# Altium PCB Capacitor1.0PCB.pcbdoc
Units mil, origin at the board's own origin, x right, y up, seen from the top; angles counter-clockwise.
Board outline 3165.09 x 2926.12 mil, 2 copper layers (Top Layer, Bottom Layer); 95 components, 60 nets, 238 pads, 394 vias.
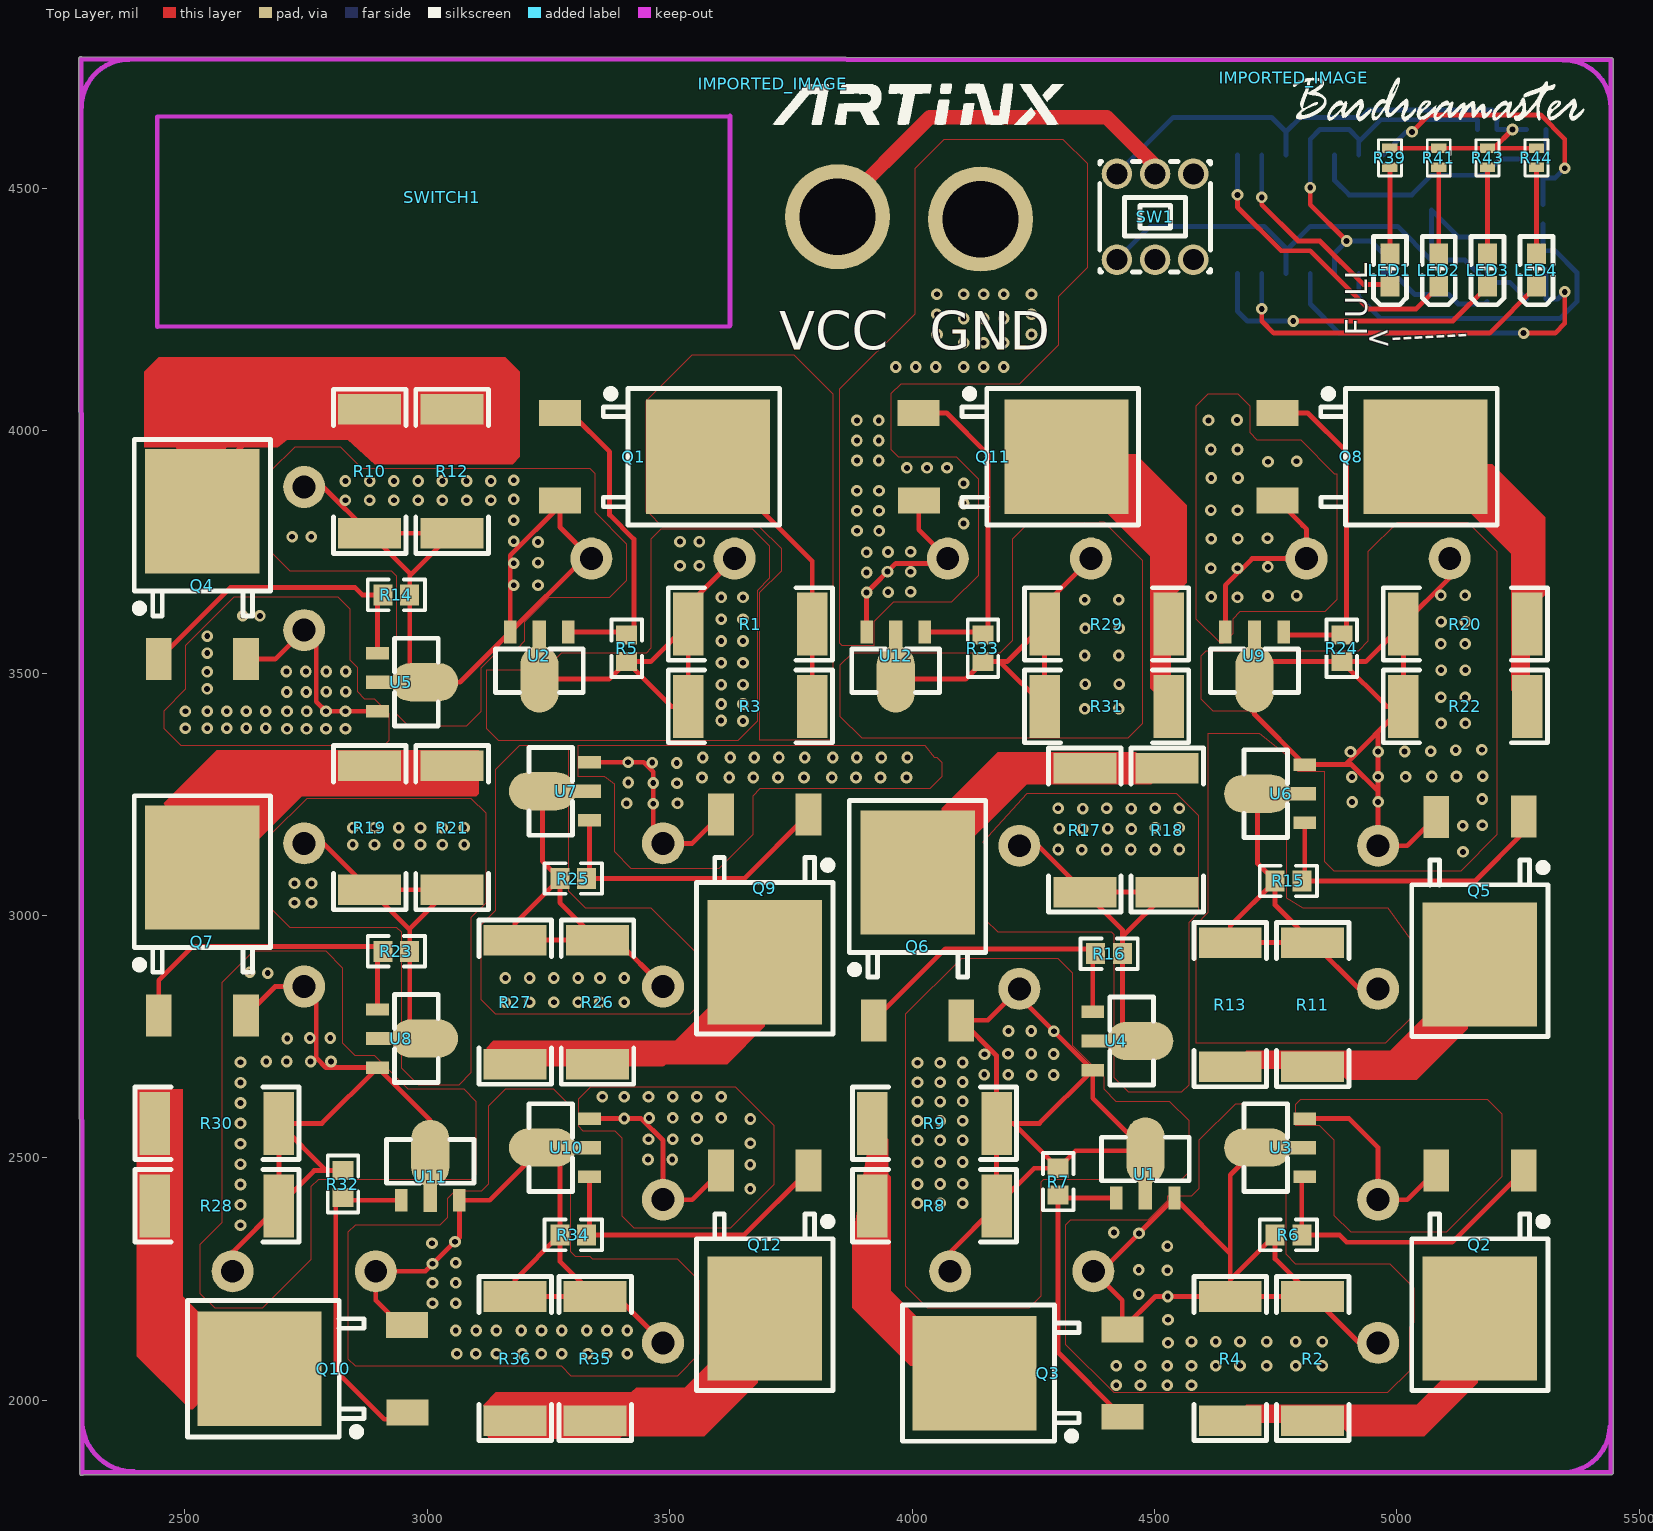
[diagram p0: Top Layer view]
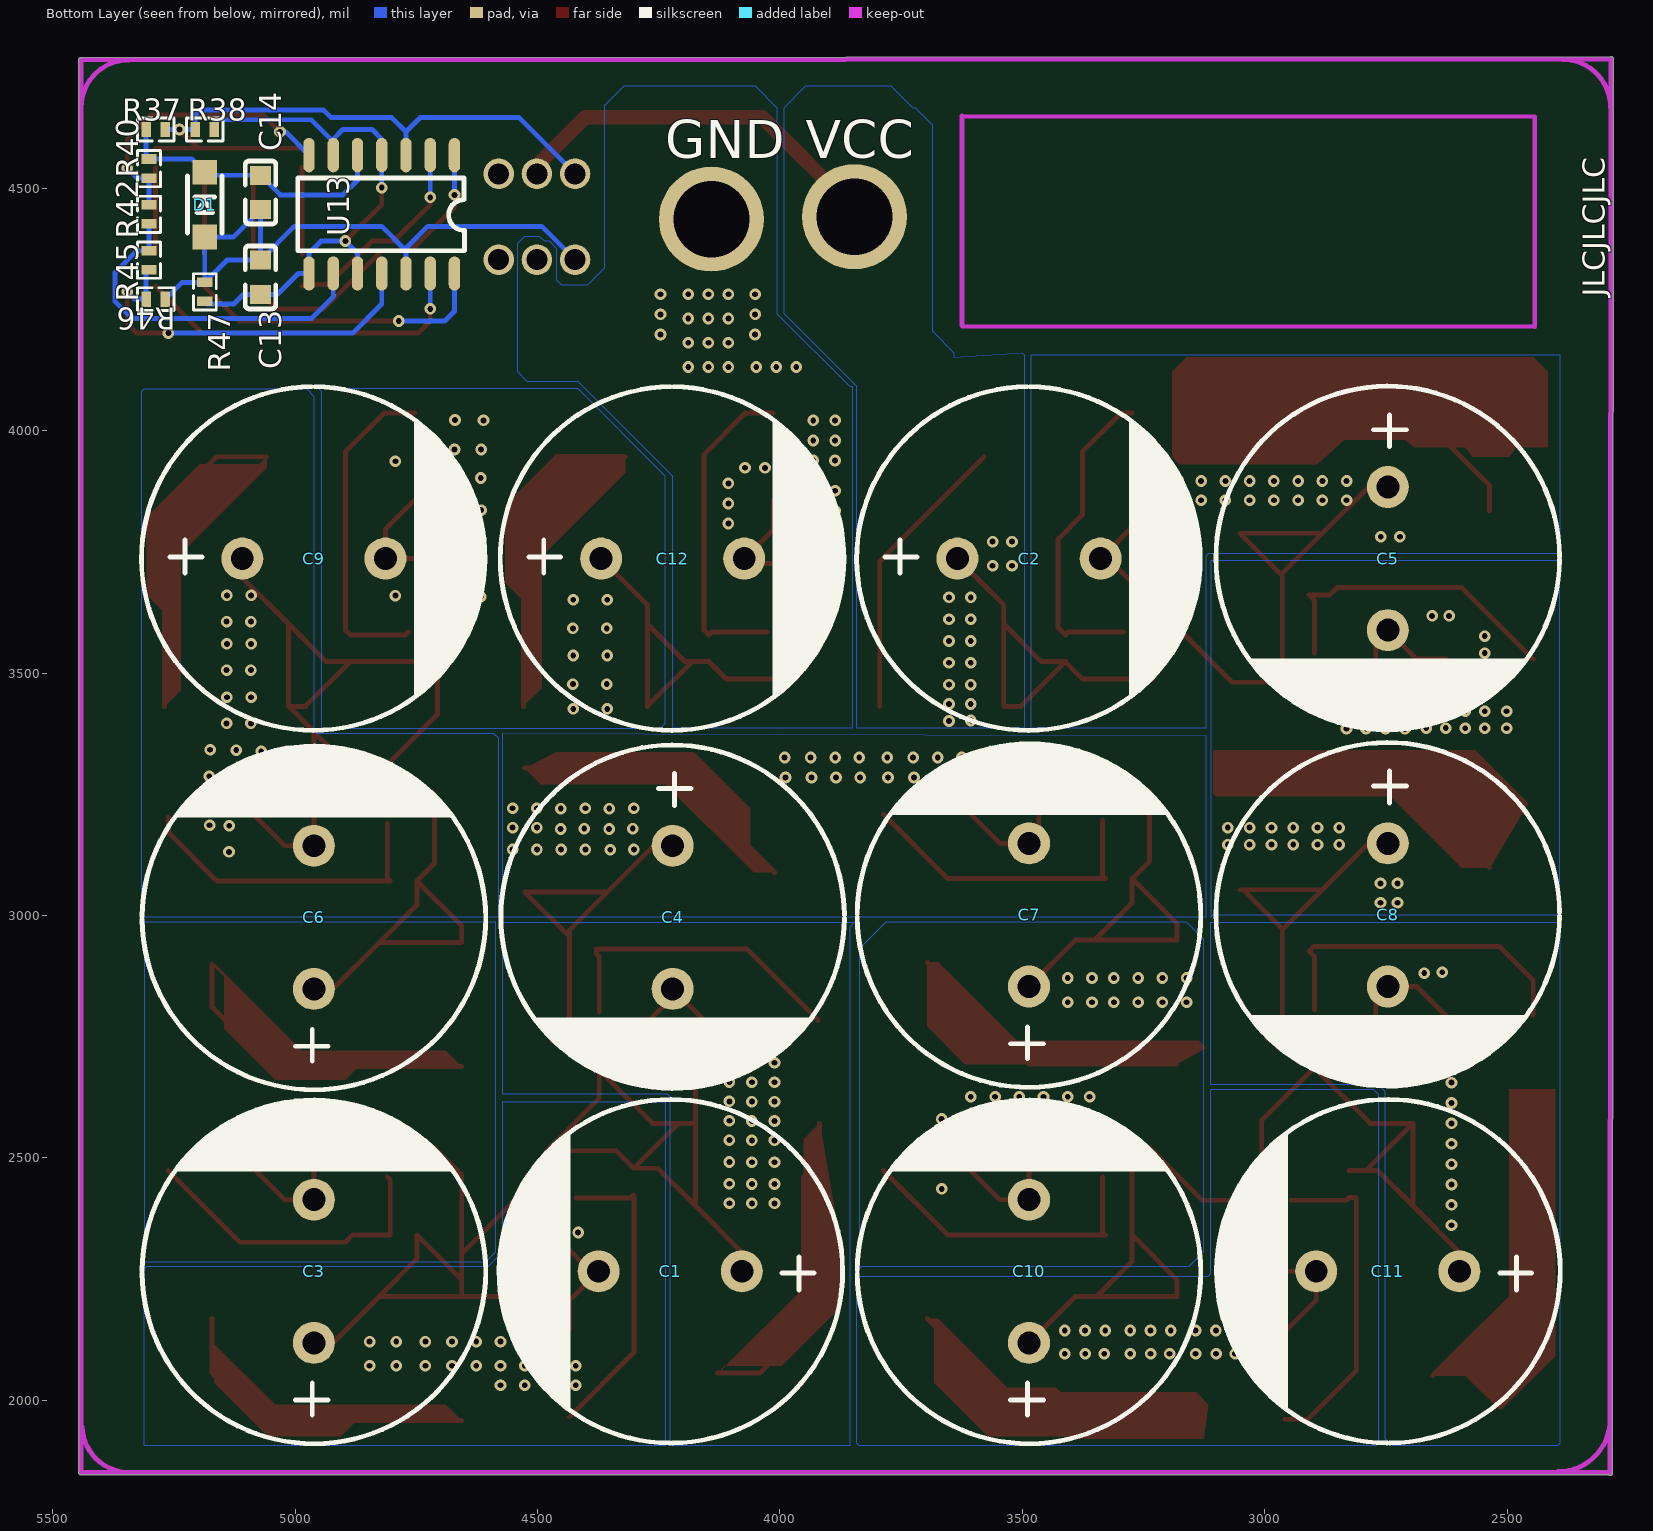
[diagram p1: Bottom Layer view, seen from below]

## Layer stack, top to bottom
Top Solder: solder mask 0.4, Solder Resist, Dk 3.5
Top Layer: signal copper 1.4
Dielectric1: dielectric 12.6, FR-4, Dk 4.8
Bottom Layer: signal copper 1.4
Bottom Solder: solder mask 0.4, Solder Resist, Dk 3.5

## Board outline
2282.83,1850 2281.14,4766.03 cw(c2286.15,4766.03) 2286.25,4771.05 cw(c2286.99,4766.09) 2286.99,4771.1 5440.49,4769.43 cw(c5441.21,4764.46) 5446.22,4764.46 5446.23,1851.04 cw(c5441.21,1851.04) 5441.21,1846.02 2290.9,1846.02 cw(c2287.84,1850)

## Design rules (kind name [scope] priority, off if disabled: settings)
Clearance [All] p1: gap=10 ignorepadtopadclearanceinfootprint=FALSE except(0: Arc-Hole Track-Hole SMDPad-Hole THPad-Hole Via-Hole Fill-Hole Poly-Hole Region-Hole Text-Hole)
PolygonConnect [All] p1: connectstyle=Relief reliefconductorwidth=10 reliefentries=4 polygonreliefangle="90 Angle" airgapwidth=10
RoutingVias [All] p1: holewidth=28 width=50 viastyle="Through Hole" minholewidth=28 minwidth=50 maxholewidth=28 maxwidth=50
SolderMaskExpansion [All] p1: expansion=4
Width [All] p1: maxlimit=10 minlimit=10 preferedwidth=10
30 further rules are at their usual default settings.

## Components (designator, comment, footprint, x,y, rotation, side; value= is the part's Value field where it differs from the comment)
C1 "120uF" CAP-TH_BD18.0-P7.50-D1.2-FD 4226.21,2266.04 r180 bottom
C2 "120uF" CAP-TH_BD18.0-P7.50-D1.2-FD 3486.21,3736.04 r0 bottom
C3 "120uF" CAP-TH_BD18.0-P7.50-D1.2-FD 4961.21,2266.04 r270 bottom
C4 "120uF" CAP-TH_BD18.0-P7.50-D1.2-FD 4221.21,2996.04 r90 bottom
C5 "120uF" CAP-TH_BD18.0-P7.50-D1.2-FD 2746.21,3736.04 r90 bottom
C6 "120uF" CAP-TH_BD18.0-P7.50-D1.2-FD 4961.21,2996.04 r270 bottom
C7 "120uF" CAP-TH_BD18.0-P7.50-D1.2-FD 3486.21,3001.04 r270 bottom
C8 "120uF" CAP-TH_BD18.0-P7.50-D1.2-FD 2746.21,3001.04 r90 bottom
C9 "120uF" CAP-TH_BD18.0-P7.50-D1.2-FD 4961.21,3736.04 r0 bottom
C10 "120uF" CAP-TH_BD18.0-P7.50-D1.2-FD 3486.21,2266.04 r270 bottom
C11 "120uF" CAP-TH_BD18.0-P7.50-D1.2-FD 2746.21,2266.04 r180 bottom
C12 "120uF" CAP-TH_BD18.0-P7.50-D1.2-FD 4221.21,3736.04 r0 bottom
C13 "1uF" C0603 5071.21,4316.04 r90 bottom
C14 "1uF" C0603 5071.21,4491.04 r270 bottom
D1 "LMSZ5233BT1G" SOD-123_L2.7-W1.6-LS3.7-RD 5186.2,4466.04 r90 bottom
IMPORTED_IMAGE "Comment" IMPORTED_IMAGE 4786.99,4727.94 r0 top
IMPORTED_IMAGE "Comment" IMPORTED_IMAGE 3712.72,4715.24 r0 top
LED1 "ORH-G36G" LED0603-R-RD 4985.44,4331.04 r90 top
LED2 "ORH-G36G" LED0603-R-RD 5086.21,4331.04 r90 top
LED3 "ORH-G36G" LED0603-R-RD 5186.98,4331.04 r90 top
LED4 "ORH-G36G" LED0603-R-RD 5287.76,4331.13 r90 top
Q1 "2SD1804L-T-TN3-R" TO-252-2_L6.5-W6.1-P4.58-LS10.0-BR 3426.21,3946.04 r180 top
Q2 "2SD1804L-T-TN3-R" TO-252-2_L6.5-W6.1-P4.58-LS10.0-BR 5171.21,2321.04 r90 top
Q3 "2SD1804L-T-TN3-R" TO-252-2_L6.5-W6.1-P4.58-LS10.0-BR 4281.21,2056.04 r0 top
Q4 "2SD1804L-T-TN3-R" TO-252-2_L6.5-W6.1-P4.58-LS10.0-BR 2536.21,3681.04 r270 top
Q5 "2SD1804L-T-TN3-R" TO-252-2_L6.5-W6.1-P4.58-LS10.0-BR 5171.21,3051.04 r90 top
Q6 "2SD1804L-T-TN3-R" TO-252-2_L6.5-W6.1-P4.58-LS10.0-BR 4011.21,2936.04 r270 top
Q7 "2SD1804L-T-TN3-R" TO-252-2_L6.5-W6.1-P4.58-LS10.0-BR 2536.21,2946.04 r270 top
Q8 "2SD1804L-T-TN3-R" TO-252-2_L6.5-W6.1-P4.58-LS10.0-BR 4906.21,3946.04 r180 top
Q9 "2SD1804L-T-TN3-R" TO-252-2_L6.5-W6.1-P4.58-LS10.0-BR 3696.21,3056.04 r90 top
Q10 "2SD1804L-T-TN3-R" TO-252-2_L6.5-W6.1-P4.58-LS10.0-BR 2806.21,2065 r0 top
Q11 "2SD1804L-T-TN3-R" TO-252-2_L6.5-W6.1-P4.58-LS10.0-BR 4166.21,3946.04 r180 top
Q12 "2SD1804L-T-TN3-R" TO-252-2_L6.5-W6.1-P4.58-LS10.0-BR 3696.21,2321.04 r90 top
R1 "4.7" R2512 3666.21,3601.04 r0 top
R2 "4.7" R2512 4826.21,2086.04 r270 top
R3 "4.7" R2512 3666.21,3431.04 r0 top
R4 "4.7" R2512 4656.21,2086.04 r270 top
R5 "1K" 0603 3411.21,3551.04 r90 top
R6 "1K" 0603 4776.21,2341.04 r0 top
R7 "1K" 0603 4301.21,2451.04 r270 top
R8 "4.7" R2512 4046.21,2401.04 r180 top
R9 "4.7" R2512 4046.21,2571.04 r180 top
R10 "4.7" R2512 2881.21,3916.04 r90 top
R11 "4.7" R2512 4826.21,2816.04 r270 top
R12 "4.7" R2512 3051.21,3916.04 r90 top
R13 "4.7" R2512 4656.21,2816.04 r270 top
R14 "1K" 0603 2936.21,3661.04 r180 top
R15 "1K" 0603 4776.21,3071.04 r0 top
R16 "1K" 0603 4406.21,2921.04 r180 top
R17 "4.7" R2512 4356.21,3176.04 r90 top
R18 "4.7" R2512 4526.21,3176.04 r90 top
R19 "4.7" R2512 2881.21,3181.04 r90 top
R20 "4.7" R2512 5141.21,3601.04 r0 top
R21 "4.7" R2512 3051.21,3181.04 r90 top
R22 "4.7" R2512 5141.21,3431.04 r0 top
R23 "1K" 0603 2936.21,2926.04 r180 top
R24 "1K" 0603 4886.21,3551.04 r90 top
R25 "1K" 0603 3301.21,3076.04 r0 top
R26 "4.7" R2512 3351.21,2821.04 r270 top
R27 "4.7" R2512 3181.21,2821.04 r270 top
R28 "4.7" R2512 2566.21,2401.04 r180 top
R29 "4.7" R2512 4401.21,3601.04 r0 top
R30 "4.7" R2512 2566.21,2571.04 r180 top
R31 "4.7" R2512 4401.21,3431.04 r0 top
R32 "1K" 0603 2826.21,2446.04 r270 top
R33 "1K" 0603 4146.21,3551.04 r90 top
R34 "1K" 0603 3301.21,2341.04 r0 top
R35 "4.7" R2512 3346.21,2086.04 r270 top
R36 "4.7" R2512 3181.21,2086.04 r270 top
R37 "1K" R0402#1 5287.43,4621.04 r0 bottom
R38 "3.4K" R0402#1 5186.21,4621.04 r180 bottom
R39 "1.3K" R0402#2 4985.44,4562.54 r90 top
R40 "1K" R0402#1 5301.21,4540.43 r270 bottom
R41 "1.3K" R0402#2 5086.21,4562.54 r90 top
R42 "1K" R0402#1 5301.21,4446.04 r270 bottom
R43 "1.3K" R0402#2 5186.98,4562.54 r90 top
R44 "1.3K" R0402#2 5287.76,4562.54 r90 top
R45 "1K" R0402#1 5301.21,4351.65 r270 bottom
R46 "1K" R0402#1 5287.44,4271.04 r180 bottom
R47 "1K" R0402#1 5186.2,4286.04 r90 bottom
SW1 "K8-5851E-L1" SW-TH_6P-L5.8-W5.8-P2.00-LS4.5-BL 4501.21,4441.04 r180 top
SWITCH1 "SWITCH" ? 3031.21,4481.04 r0 top
U1 "HT7027A-1" SOT-89#1 4481.21,2466.04 r0 top
U2 "HT7027A-1" SOT-89#1 3231.21,3536.04 r180 top
U3 "HT7027A-1" SOT-89#1 4761.21,2521.04 r90 top
U4 "HT7027A-1" SOT-89#1 4421.21,2741.04 r270 top
U5 "HT7027A-1" SOT-89#2 2946.21,3481.04 r270 top
U6 "HT7027A-1" SOT-89#1 4761.21,3251.04 r90 top
U7 "HT7027A-1" SOT-89#1 3286.21,3256.04 r90 top
U8 "HT7027A-1" SOT-89#1 2946.21,2746.04 r270 top
U9 "HT7027A-1" SOT-89#1 4706.21,3536.04 r180 top
U10 "HT7027A-1" SOT-89#1 3286.21,2521.04 r90 top
U11 "HT7027A-1" SOT-89#1 3006.21,2461.04 r0 top
U12 "HT7027A-1" SOT-89#1 3966.21,3536.04 r180 top
U13 "LM339D" SOIC-14_L8.7-W3.9-P1.27-LS6.0-BL 4821.21,4446.04 r180 bottom

## Footprints (in the part's own frame and the unit in brackets; to place one, negate y for a bottom-side part, rotate by r counter-clockwise, add the part's x,y. Pads: shape width x height; smd on the part's side, far side on the other; paste and mask are expansions set on the pad)
0603 [mm]
  rect 1x1.1 smd: 1(-0.7,0) 2(0.7,0)
  silkscreen extent -1.5,-0.8 1.5,0.8
C0603 [mm]
  rect 1x1.1 smd: 1(0.9,0) 2(-0.9,0)
  silkscreen extent -1.65,-0.8 1.65,0.8
CAP-TH_BD18.0-P7.50-D1.2-FD [mm]
  round 2.2 hole 1.2: 1(3.75,0) 2(-3.75,0)
  silkscreen extent -9,-9 9.03,9
IMPORTED_IMAGE [mil]
  silkscreen extent -1,-90 599,0
LED0603-R-RD [mil]
  rect 43x39 smd: 1(33.5,0) 2(-33.5,0)
  silkscreen extent -72,-34 70,34
R0402#1 [mm]
  rect 0.5x0.8 smd: 1(0.5,0) 2(-0.5,0)
  silkscreen extent -0.95,-0.6 0.95,0.6
R0402#2 [mm]
  rect 0.5x0.8 smd: 1(-0.5,0) 2(0.5,0)
  silkscreen extent -0.95,-0.6 0.95,0.6
R2512 [mm]
  rect 1.6x3.3 smd: 1(-3.25,0) 2(3.25,0)
  silkscreen extent -4.3,-1.9 4.3,1.9
SOD-123_L2.7-W1.6-LS3.7-RD [mm]
  rect 1.3x1.3 smd: 1(1.7,0) 2(-1.7,0)
  silkscreen extent -1.5,-0.9 1.5,0.9
SOIC-14_L8.7-W3.9-P1.27-LS6.0-BL [mm]
  oval 0.6x1.798 smd: 1(3.81,3.1) 2(2.54,3.1) 3(1.27,3.1) 4(0,3.1) 5(-1.27,3.1) 6(-2.54,3.1) 7(-3.81,3.1) 8(-3.81,-3.1) 9(-2.54,-3.1) 10(-1.27,-3.1) 11(0,-3.1) 12(1.27,-3.1) 13(2.54,-3.1) 14(3.81,-3.1)
  silkscreen extent -4.4,-1.91 4.34,1.9
SOT-89#1 [mil]
  rect 25.59x47 smd: 1(-60,-48.59) 3(60,-48.59)
  rect 27.56x75 smd: 2(0,-34.81)
  oval 78.74x137.79 smd: 2(0,48.59)
  silkscreen extent -91,-13 91,77
SOT-89#2 [mil]
  rect 25.59x47 smd: 1(-60,-48.59) 3(60,-48.59)
  oval 78.74x137.8 smd: 2(0,48.59)
  rect 27.56x75 smd: 2(0,-34.81)
  silkscreen extent -91,-13 91,77
SW-TH_6P-L5.8-W5.8-P2.00-LS4.5-BL [mm]
  round 1.6 hole 1.1: 1(-2,-2.25) 2(0,-2.25) 3(2,-2.25) 4(-2,2.25) 5(0,2.25) 6(2,2.25)
  silkscreen extent -2.9,-2.9 2.9,2.9
TO-252-2_L6.5-W6.1-P4.58-LS10.0-BR [mm]
  rect 2.2x1.35 smd: 1(3.876,-2.29) 3(3.871,2.29)
  rect 6.5x6 smd: 4(-3.876,0)
  silkscreen extent -7.64,-3.57 1.61,3.57
? [mil]
  Keep-Out Layer lines w10: -588.05,-266.95 -588.05,166.12 592.5,167.29 ; -587.42,-266.95 592.58,-265.84 ; 591.9,-263.68 593.1,-263.68 593.1,168.22

## Free pads (board coordinates)
  round 216.53 hole 157.48: 1(4141.21,4436.04) 2(3846.21,4441.04)

## Via types
v1: diameter 24, hole 12, Top Layer to Bottom Layer, 394 vias

## Nets (pads, with @x,y where several pads share a name; then routed paths per layer and width w, separated by ;. In a path a pad name is that pad's centre, name@x,y a point inside that pad or via, vN(x,y) a via of type N, cw(c..) or ccw(c..) an arc to the next point about the centre after c; other vN are vias at no path point)
GND: C12.2 pad.1 Q11.3 SW1.5 U12.3 | length 422.4
  Top Layer w10: U12.3 v1(3906.21,3666.04) 3966.21,3726.04 4063.57,3726.04 C12.2 4013.81,3795.8 Q11.3
  other v1: 3950.5,3666.75 3996.93,3667.47 3906.16,3707.41 3949.37,3709.2 3996.87,3708.84 3906.16,3748.78 3950.45,3749.49 3996.87,3750.2 3886.26,3793.3 3931.93,3793.18 4106.26,3808.3 3886.21,3834.67 3931.87,3834.55 4106.21,3849.67 3886.21,3876.04 3931.87,3875.92 4106.21,3891.04 3989.26,3923.11 4030.62,3923.11 4071.99,3923.16 3886.26,3938.3 3931.26,3938.3 3886.21,3979.67 3931.21,3979.67 3886.21,4021.04 3931.21,4021.04 3966.21,4131.04 4007.58,4131.04 4048.95,4131.09 4106.21,4131.04 4147.58,4131.04 4188.94,4131.09 4106.21,4181.04 4147.58,4181.04 4188.94,4181.09 4051.26,4198.3 4246.26,4198.3 4106.21,4231.04 4147.58,4231.04 4188.94,4231.09 4051.21,4239.67 4246.21,4239.67 4051.21,4281.04 4106.21,4281.04 4147.58,4281.04 4188.94,4281.09 4246.21,4281.04
LED1_1: LED1.1 R39.1 | length 178.3
  Top Layer w10: LED1.1 R39.1
LED2_1: LED2.1 R41.1 | length 176.8
  Top Layer w10: LED2.1 R41.1@5086.21,4541.35
LED3_1: LED3.1 R43.1 | length 178.3
  Top Layer w10: LED3.1 R43.1
LED4_1: LED4.1 R44.1 | length 178.2
  Top Layer w10: LED4.1 R44.1
Q1_4: Q1.4 R1.2 R3.2 | length 604.2
  Top Layer w10: Q1.4 3794.16,3730.69 R1.2 R3.2
Q2_4: Q2.4 R2.2 R4.2 | length 668
  Top Layer w10: R4.2 R2.2 ; R2.2@4826.21,1958.04 5073.21,1958.04 5171.21,2056.04 Q2.4
Q3_4: Q3.4 R8.2 R9.2 | length 653.3
  Top Layer w10: R8.2@3918.21,2401.04 3918.21,2179.04 4041.21,2056.04 Q3.4 ; R8.2 R9.2
Q4_3: C5.2 C8.1 Q4.3 R19.1 R21.1 R23.1 U5.3 U8.2 | length 1296.3
  Top Layer w10: Q4.3 2686.45,3528.64 C5.2 2771.21,3563.4 2771.21,3441.04 v1(2791.21,3421.04) v1(2831.52,3421.04) U5.3 ; C8.1 2785.62,3148.67 R19.1 ; U8.2@2994.8,2746.04 2963.77,2777.06 R23.1 ; R21.1@3044.76,3053.08 2963.77,2972.1 R23.1 ; R21.1 R19.1 ; R19.1 2963.77,2970.52 R23.1
  other v1: 2726.21,3026.04 2761.21,3026.04 2726.21,3066.04 2761.21,3066.04 2846.21,3146.04 2891.21,3146.04 2941.21,3146.04 2986.21,3146.04 3031.21,3146.04 3076.21,3146.04 2846.21,3181.04 2891.21,3181.04 2941.21,3181.04 2986.21,3181.04 3031.21,3181.04 3076.21,3181.04 2710.68,3384.76 2750.99,3384.76 2791.09,3384.96 2831.39,3384.96 2501.21,3386.04 2546.21,3386.04 2586.52,3386.04 2626.62,3386.24 2666.92,3386.24 2501.21,3421.04 2546.21,3421.04 2586.52,3421.04 2626.62,3421.24 2666.92,3421.24 2710.8,3420.84 2751.11,3420.84 2710.09,3460.84 2750.4,3460.84 2791.52,3461.55 2831.82,3461.55 2546,3467.27 2546,3502.27 2709.38,3502.98 2749.68,3502.98 2791.52,3502.98 2831.82,3502.98 2546.21,3541.04 2546.21,3576.04 2619.77,3617.86 2654.77,3617.86
Q4_4: Q4.4 R10.2 R12.2 | length 632.8
  Top Layer w10: Q4.4 2536.21,3886.04 2694.21,4044.04 R10.2 ; R10.2 R12.2
Q5_4: Q5.4 R11.2 R13.2 | length 653.3
  Top Layer w10: R13.2 R11.2 ; R11.2@4826.21,2688.04 5048.21,2688.04 5171.21,2811.04 Q5.4
Q6_4: Q6.4 R17.2 R18.2 | length 604.2
  Top Layer w10: Q6.4 4226.56,3303.99 R17.2 R18.2
Q7_3: C8.2 C11.1 Q7.3 R28.1 R30.1 R32.1 U8.3 U11.2 | length 1588.6
  Top Layer w10: C11.1 2598.57,2305.45 R28.1 ; Q7.3 2674.68,2841.96 2686.13,2853.4 C8.2 2771.21,2828.4 2771.21,2706.04 2791.21,2686.04 U8.3 ; U11.2@3006.21,2509.62 3006.21,2577.45 U8.3 ; R28.1 2766.73,2473.6 R32.1 2791.6,2473.6 R30.1 ; R28.1 R30.1 ; R30.1 2782.62,2571.04 U8.3
  other v1: 2614.83,2361.04 2614.83,2403.04 2614.83,2445.05 2614.83,2487.05 2614.83,2529.06 2614.83,2571.07 2614.83,2613.08 2614.83,2655.08 2614.84,2697.09 2667.98,2698.57 2709.99,2698.57 2759.41,2698.57 2801.42,2698.57 2711.21,2746.04 2757.98,2747.14 2799.99,2747.14 2671.21,2881.04 2633.99,2882.86
Q7_4: Q7.4 R19.2 R21.2 | length 602.1
  Top Layer w10: Q7.4 2746.56,3308.99 R19.2 R21.2
Q8_4: Q8.4 R20.2 R22.2 | length 662.1
  Top Layer w10: Q8.4 5161.21,3946.04 5269.21,3838.04 R20.2 ; R22.2 R20.2
Q9_4: Q9.4 R26.2 R27.2 | length 602.1
  Top Layer w10: R27.2 R26.2 3485.86,2693.08 Q9.4
Q10_3: C10.1 C11.2 Q10.3 R34.1 R35.1 R36.1 U10.2 U11.3 | length 1507.8
  Top Layer w10: Q10.3@2958.61,2141.2 2893.84,2205.96 C11.2 2996.21,2266.04 3011.72,2281.55 3066.21,2336.04 U11.3 3129.03,2412.45 3237.62,2521.04 3273.64,2485.01 R34.1 ; C10.1 3390.62,2213.99 R35.1 ; R34.1 3181.21,2248.6 R36.1 R35.1 ; R34.1 3273.64,2286.56 R35.1
  other v1: 3061.21,2096.04 3100.37,2096.04 3142.52,2096.04 3196.21,2096.04 3235.37,2096.04 3277.52,2096.04 3331.21,2096.04 3370.37,2096.04 3412.52,2096.04 3058.95,2143.9 3100.73,2143.9 3142.52,2143.9 3193.95,2143.9 3235.73,2143.9 3277.52,2143.9 3328.95,2143.9 3370.73,2143.9 3412.52,2143.9 3010.97,2200.24 3058.82,2200.24 3010.97,2242.39 3058.82,2242.03 3010.96,2281.55 3058.82,2283.81 3009.91,2324.01 3057.11,2326.94
Q10_4: Q10.4 R28.2 R30.2 | length 609.2
  Top Layer w10: R30.2 R28.2 2438.26,2266.39 Q10.4@2653.61,2051.03
Q11_4: Q11.4 R29.2 R31.2 | length 670.9
  Top Layer w10: Q11.4 4436.21,3946.04 4529.21,3853.04 R29.2 ; R31.2 R29.2
Q12_4: Q12.4 R35.2 R36.2 | length 602.1
  Top Layer w10: R36.2 R35.2 3485.86,1958.08 Q12.4
R6_2: Q2.1 R6.2 U3.1 | length 647.4
  Top Layer w10: U3.1 4803.76,2455 R6.2 4881.21,2341.03 4896.21,2326.04 5113.77,2326.04 Q2.1
R14_2: Q4.1 R14.2 U5.1 | length 654.5
  Top Layer w10: Q4.1@2446.05,3528.44 2593.65,3676.04 2851.21,3676.04 2866.21,3661.04 R14.2 2897.62,3650.01 U5.1
R23_2: Q7.1 R23.2 U8.1 | length 692.8
  Top Layer w10: Q7.1 2446.06,2865.89 2516.21,2936.04 2898.66,2936.04 2908.65,2926.04 2897.62,2915 U8.1
R32_2: Q10.1 R32.2 U11.1 | length 684
  Top Layer w10: R32.2@2826.21,2418.44 2811.21,2418.44 2811.21,2061.04 2911.41,1960.84 Q10.1@2958.81,1960.84 ; R32.2 2832.24,2412.45 U11.1
R34_2: Q12.1 R34.2 U10.1 | length 635
  Top Layer w10: U10.1 3334.8,2347.07 R34.2 3653.76,2341.03 Q12.1
S$67: 
S$69: 
S$4480: 
S$4482: 
S$4491: 
S$4493: 
S$4847: 
S$4882: 
U1_1: Q3.1 R7.2 U1.1 | length 635
  Top Layer w10: U1.1 4307.24,2417.45 R7.2 4301.21,2098.49 Q3.1
U1_2: C1.1 C4.2 Q6.3 R7.1 R8.1 R9.1 U1.2 U4.3 | length 1938.9
  Top Layer w10: C1.1 4078.57,2305.45 R8.1 ; R8.1 R9.1 ; R8.1 4251.73,2478.6 R7.1 ; R9.1 4208.77,2571.04 R7.1 ; R9.1 4262.62,2571.04 U4.3 ; R9.1 4174.16,2710.84 Q6.3 4156.45,2783.64 C4.2 4221.21,2832.45 v1(4292.53,2761.12) U4.3 ; R7.1 4337.23,2514.62 4481.21,2514.62 4372.62,2623.22 U4.3
  other v1: 4011.21,2406.04 4057.76,2406.03 4104.26,2406.53 4011.21,2446.04 4057.76,2446.03 4104.26,2446.53 4011.21,2491.04 4057.76,2491.03 4104.26,2491.53 4011.21,2536.04 4057.76,2536.03 4104.26,2536.53 4011.21,2576.04 4057.76,2576.03 4104.26,2576.53 4011.21,2616.04 4057.76,2616.03 4104.26,2616.53 4011.21,2656.04 4057.76,2656.03 4104.26,2656.53 4246.68,2670.49 4198.16,2671.23 4291.87,2670.86 4148.9,2671.6 4011.21,2696.04 4057.76,2696.03 4104.26,2696.53 4149.27,2713.82 4291.87,2714.2 4197.79,2714.57 4245.94,2714.94 4198.9,2761.6 4245.94,2761.6
U1_3: C1.2 C3.1 Q3.3 R2.1 R4.1 R6.1 U1.3 U3.2 | length 1876
  Top Layer w10: U3.2@4712.62,2521.04 4656.21,2464.62 R4.1 ; C3.1 4921.8,2118.4 R2.1 ; R4.1 4656.21,2248.6 R6.1 4748.64,2291.56 R2.1 ; R4.1 R2.1 ; R4.1 4656.21,2302.44 U1.3 4389.8,2266.04 C1.2 4433.61,2206.28 Q3.3 4501.4,2213.99 v1(4527.17,2213.99) R4.1
  other v1: 4421.21,2031.04 4471.21,2031.04 4526.21,2031.04 4576.21,2031.04 4421.21,2071.04 4471.21,2071.04 4526.21,2071.04 4576.21,2071.04 4626.21,2071.04 4676.21,2071.04 4731.21,2071.04 4791.21,2071.04 4846.21,2071.04 4527.88,2118.32 4576.21,2121.04 4626.21,2121.04 4676.21,2121.04 4731.21,2121.04 4791.21,2121.04 4846.21,2121.04 4527.88,2166.17 4467.6,2218.89 4526.6,2267.89 4467.6,2268.89 4526.6,2317.89 4468.01,2344.24 4416.21,2346.04
U2_1: Q1.1 R5.2 U2.1 | length 662.7
  Top Layer w10: Q1.1 3296.06,4036.19 3376.21,3956.04 3376.21,3826.04 3426.21,3776.04 3426.21,3593.59 R5.2 3405.18,3584.63 U2.1
U2_3: C2.2 C5.1 Q1.3 R10.1 R12.1 R14.1 U2.3 U5.2 | length 1761.1
  Top Layer w10: C5.1 2785.62,3883.67 R10.1 ; Q1.3@3273.81,3845.18 3171.21,3742.57 U2.3 ; Q1.3 3273.81,3800.8 C2.2 3322.62,3736.04 U2.3 ; R10.1 R12.1 2963.77,3700.64 R14.1 ; R10.1 2963.77,3705.52 R14.1 ; R14.1 2963.77,3593.7 2963.77,3512.07 2994.8,3481.04 3067.62,3481.04 U2.3
  other v1: 3178.56,3681.07 3228.56,3681.07 3178.56,3726.4 3228.56,3727.73 3228.56,3770.21 3178.56,3771.64 2721.21,3781.04 2760.84,3781.03 3178.56,3815.21 2831.2,3856.41 2881.2,3856.41 2931.2,3856.41 2981.2,3856.41 3031.2,3856.41 3081.2,3856.41 3131.2,3856.41 3178.56,3858.07 2831.21,3896.04 2881.21,3896.04 2931.21,3896.04 2981.21,3896.04 3031.21,3896.04 3081.21,3896.04 3131.21,3896.04 3178.57,3897.7
U4_1: Q6.1 R16.2 U4.1 | length 651.2
  Top Layer w10: Q6.1@3921.01,2783.44 4068.61,2931.04 4378.61,2931.04 R16.2 ; U4.1 4372.62,2915 R16.2@4378.65,2921.04
U4_2: C4.1 C7.2 Q9.3 R16.1 R17.1 R18.1 U4.2 U7.3 | length 1304
  Top Layer w10: U7.3 v1(3414.29,3316.04) 3446.21,3316.04 3466.21,3296.04 v1(3466.21,3230.51) 3466.21,3168.67 C7.2 3546.29,3148.67 Q9.3 ; C4.1 4260.62,3143.67 R17.1 ; U4.2@4469.8,2741.04 4433.77,2777.06 R16.1 ; R17.1 4433.77,2970.52 R16.1 ; R17.1 R18.1 4433.77,2955.65 R16.1
  other v1: 4349.99,3135.32 4301.21,3136.04 4401.21,3136.04 4451.21,3136.04 4501.21,3136.04 4551.21,3136.04 4352.25,3178.37 4452.25,3178.37 4303.47,3179.09 4403.47,3179.09 4501.21,3181.04 4551.21,3181.04 4351.92,3220.32 4451.92,3220.32 4301.21,3221.04 4401.21,3221.04 4501.21,3221.04 4551.21,3221.04 3411.21,3231.04 3516.21,3231.04 3514.99,3272.47 3466.21,3273.18 3414.61,3274.08 3566.61,3284.51 3623.04,3284.51 3672.7,3284.51 3723.41,3284.51 3776.99,3284.51 3834.59,3284.51 3884.25,3284.51 3934.96,3284.51 3988.53,3284.51 3514.66,3314.42 3463.95,3315.13 3568.4,3325.66 3624.83,3325.65 3674.49,3325.65 3725.2,3325.66 3778.77,3325.66 3836.38,3325.66 3886.03,3325.66 3936.75,3325.65 3990.32,3325.65
U6_1: Q5.1 R15.2 U6.1 | length 654
  Top Layer w10: U6.1 4809.8,3077.07 R15.2 5161.21,3071.04 5261.36,3171.19 Q5.1
U6_2: C3.2 C6.1 Q2.3 R11.1 R13.1 R15.1 U3.3 U6.2 | length 1292.2
  Top Layer w10: U6.2@4712.62,3251.04 4712.62,3107.06 R15.1 ; U3.3 4901.21,2581.04 4961.21,2521.04 C3.2 5021.29,2413.67 Q2.3 ; C6.1 4921.8,2848.4 R11.1 ; R15.1 4748.64,3021.56 R11.1 ; R15.1 4656.21,2978.6 R13.1 R11.1
U7_1: Q9.1 R25.2 U7.1 | length 635
  Top Layer w10: U7.1 3334.8,3082.07 R25.2 3653.76,3076.03 Q9.1
U7_2: C7.1 C10.2 Q12.3 R25.1 R26.1 R27.1 U7.2 U10.3 | length 1301
  Top Layer w10: U7.2@3237.62,3256.04 3237.62,3112.06 R25.1 ; U10.3 3388.1,2581.04 v1(3406.17,2581.04) 3441.21,2581.04 3486.21,2536.04 C10.2 3546.29,2413.67 Q12.3 ; C7.1 3390.62,2948.99 R26.1 ; R25.1 3181.21,2983.6 R27.1 R26.1 ; R25.1 3273.64,3026.56 R26.1
  other v1: 3666.21,2436.04 3666.21,2486.04 3455.4,2496.47 3505.4,2496.47 3666.4,2530.14 3456.4,2538.47 3506.4,2538.47 3556.4,2538.47 3666.4,2580.14 3457.6,2582.2 3506.4,2582.47 3556.4,2582.47 3606.4,2582.47 3361.21,2626.04 3406.21,2626.04 3456.21,2626.04 3506.21,2626.04 3556.21,2626.04 3606.21,2626.04 3161.21,2821.04 3211.21,2821.04 3261.21,2821.04 3311.21,2821.04 3356.21,2821.04 3406.21,2821.04 3161.21,2871.04 3211.21,2871.04 3261.21,2871.04 3311.21,2871.04 3356.21,2871.04 3406.21,2871.04
U9_1: Q8.1 R24.2 U9.1 | length 679.9
  Top Layer w10: Q8.1 4816.06,4036.19 4896.21,3956.04 4896.21,3588.59 R24.2 4772.25,3578.59 U9.1
U9_2: C6.2 C9.1 Q5.3 R20.1 R22.1 R24.1 U6.3 U9.2 | length 2076.6
  Top Layer w10: Q5.3 5021.29,3143.67 C6.2 ; C9.1 5108.85,3696.63 R20.1 ; U6.3 4893.25,3311.04 R22.1 ; U6.3 4706.21,3414.63 4706.21,3487.45 4742.23,3523.47 R24.1 ; U6.3 4906.21,3311.04 4961.21,3256.04 v1(4961.21,3234.25) C6.2 ; R24.1 4935.69,3523.47 R20.1 ; R24.1 4978.65,3431.04 R22.1 ; C6.2 4961.21,3378.99 R22.1 ; R22.1 R20.1
  other v1: 5136.21,3131.04 5135.63,3185.11 5176.21,3186.04 4907.64,3233.96 5175.63,3240.11 4907.14,3285.46 4961.21,3286.04 5017.92,3285.82 5071.99,3286.39 5122.92,3286.53 5176.99,3287.11 4904.35,3337.25 4961.21,3337.82 5015.78,3337.96 5069.85,3338.54 5121.21,3341.04 5175.28,3341.62 5091.21,3396.04 5141.21,3396.04 5090.63,3450.11 5140.63,3450.11 5091.21,3506.04 5141.21,3506.04 5090.63,3560.11 5140.63,3560.11 5091.21,3606.04 5141.21,3606.04 5090.63,3660.11 5140.63,3660.11
U12_1: Q11.1 R33.2 U12.1 | length 677
  Top Layer w10: Q11.1 4071.06,4036.19 4156.21,3951.04 4156.21,3588.59 R33.2 4140.17,3584.63 U12.1
U12_2: C9.2 C12.1 Q8.3 R29.1 R31.1 R33.1 U9.3 U12.2 | length 1295.2
  Top Layer w10: U12.2@3966.21,3487.45 4110.19,3487.45 R33.1 ; C12.1 4273.26,3640.45 R29.1 ; U9.3 4646.21,3681.04 4701.21,3736.04 C9.2 4813.57,3796.12 4805.32,3804.38 Q8.3 ; R33.1 4195.69,3523.47 R29.1 ; R33.1 4180.82,3523.47 R31.1 R29.1
  other v1: 4356.21,3426.04 4426.21,3426.04 4357.05,3477.07 4427.05,3477.07 4356.21,3536.04 4426.21,3536.04 4357.05,3592.07 4427.05,3592.07 4356.21,3651.04 4426.21,3651.04 4671.21,3656.04 4617.05,3657.07 4734.03,3658.76 4793,3659.6 4616.21,3716.04 4671.21,3716.04 4733.88,3718.79 4617.05,3777.07 4671.88,3776.79 4733.03,3777.76 4616.21,3836.04 4671.03,3835.76 4617.05,3902.07 4672.05,3902.07 4734.03,3935.76 4793,3936.6 4616.21,3961.04 4671.21,3961.04 4611.21,4021.04 4670.17,4021.88
U13_1: LED2.2 U13.1 | length 628.3
  Top Layer w10: v1(4671.21,4486.04) 4671.21,4461.04 4761.21,4371.04 4821.21,4371.04 4941.21,4251.04 5039.71,4251.04 LED2.2
  Bottom Layer w10: v1(4671.21,4486.04) U13.1
U13_2: LED1.2 U13.2 | length 436.1
  Top Layer w10: v1(4721.21,4481.04) 4721.21,4466.04 4796.21,4391.04 4841.21,4391.04 4931.21,4301.04 4981.94,4301.04 LED1.2
  Bottom Layer w10: v1(4721.21,4481.04) U13.2
U13_3: R37.2 R38.2 R39.2 R41.2 R43.2 R44.2 SW1.3 U13.3 | length 1424.5
  Top Layer w10: R39.2 R41.2 R43.2 ; v1(5238.29,4621.04) 5199.48,4582.22 R43.2 ; R44.2 R43.2
  Bottom Layer w10: SW1.3 4538.91,4646.04 4741.21,4646.04 4771.21,4616.04 ; R37.2 v1(5238.29,4621.04) R38.2 5206.21,4651.04 5196.21,4661.04 4941.21,4661.04 4926.21,4646.04 4801.21,4646.04 4771.21,4616.04 ; 4771.21,4616.04 U13.3 4771.21,4616.04
U13_4: C13.2 R38.1 R47.2 U13.4 U13.6 U13.8 U13.10 | length 1150.5
  Top Layer w10: v1(4821.21,4501.04) 4821.21,4466.04 v1(4896.21,4391.04)
  Bottom Layer w10: v1(4821.21,4501.04) U13.4 ; U13.4 4821.21,4601.04 4841.21,4621.04 4901.21,4621.04 4921.21,4601.04 U13.6 4921.21,4596.04 4966.21,4641.04 5166.51,4641.04 R38.1 ; U13.10@4871.21,4323.94 4871.21,4366.04 v1(4896.21,4391.04) 4946.21,4391.04 4971.21,4366.04 U13.8@4971.21,4323.94 ; U13.8 4993.26,4323.99 5036.65,4280.6 C13.2 5106.65,4280.6 5126.21,4261.04 5180.88,4261.04 R47.2
U13_5: C14.2 D1.1 R37.1 R40.2 U13.5 | length 592
  Bottom Layer w10: U13.5 4871.21,4516.04 4901.21,4486.04 5030.81,4486.04 5071.21,4526.44 5179.71,4526.47 D1.1 5213.35,4560.11 R40.2 5307.11,4560.11 R37.1
U13_7: R40.1 R42.2 U13.7 | length 598.5
  Top Layer w10: v1(5031.21,4616.04) 5066.21,4651.04 5296.21,4651.04 5346.21,4601.04 v1(5346.21,4541.04)
  Bottom Layer w10: U13.7 5019.16,4616.04 v1(5031.21,4616.04) ; R42.2 R40.1 5325.92,4520.74 v1(5346.21,4541.04)
U13_9: R42.1 R45.2 U13.9 | length 734.7
  Bottom Layer w10: U13.9@4921.21,4323.94 4921.21,4276.04 4966.21,4231.04 5336.21,4231.04 5371.21,4266.04 5371.21,4326.04 5326.21,4371.04 R45.2 R42.1
U13_11: R45.1 R46.2 U13.11 | length 798.2
  Top Layer w10: v1(5261.21,4201.04) 5326.21,4201.04 5346.21,4221.04 v1(5346.21,4286.04)
  Bottom Layer w10: U13.11 4821.21,4261.04 4881.21,4201.04 v1(5261.21,4201.04) ; R45.1 5307.12,4331.97 R46.2 5331.21,4271.03 v1(5346.21,4286.04)
U13_12: C13.1 C14.1 D1.2 R46.1 R47.1 SW1.6 U13.12 | length 1410.2
  Bottom Layer w10: SW1.6 4491.05,4421.04 4726.21,4421.04 4771.21,4376.04 U13.12 ; U13.12@4771.21,4323.94 4771.21,4371.04 4821.21,4421.04 5001.61,4421.04 C13.1@5071.21,4351.44 ; R46.1 5233.06,4305.73 R47.1 ; C13.1 C14.1 5127.7,4399.11 D1.2 R47.1 ; C13.1 5140.45,4351.47 R47.1
U13_13: LED4.2 U13.13 | length 714.9
  Top Layer w10: v1(4721.21,4251.04) 4721.21,4226.04 4746.21,4201.04 5191.16,4201.04 LED4.2
  Bottom Layer w10: v1(4721.21,4251.04) U13.13
U13_14: LED3.2 U13.14 | length 631.7
  Top Layer w10: v1(4786.21,4226.04) 5115.51,4226.04 LED3.2
  Bottom Layer w10: U13.14 4671.21,4246.04 4691.21,4226.04 v1(4786.21,4226.04)
VCC: C2.1 pad.2 R1.1 R3.1 R5.1 SW1.2 U2.2 | length 1670.5
  Top Layer w10: U2.2@3231.21,3487.45 3375.19,3487.45 R5.1 ; C2.1 3589.4,3691.59 3538.26,3640.45 R1.1 ; R5.1 3460.69,3523.47 R1.1 ; R5.1 3503.65,3431.04 R3.1 R1.1
  Top Layer w30: pad.2 3846.21,4456.04 4036.21,4646.04 4401.21,4646.04 4501.21,4546.04 SW1.2
  other v1: 3651.21,3401.04 3606.02,3402.11 3606.21,3436.04 3651.21,3436.04 3606.21,3476.04 3651.21,3476.04 3606.21,3521.04 3651.21,3521.04 3606.21,3566.04 3651.21,3566.04 3606.21,3611.04 3651.21,3611.04 3606.21,3656.04 3651.21,3656.04 3521.21,3721.04 3561.21,3721.04 3521.21,3771.04 3561.21,3771.04
pads on no net: SW1.1 SW1.4

## Polygon pours and split planes (outlines as drawn)
VCC on Bottom Layer "Bottom Layer-VCC" (solid, pour order 0): 3501.21,4161.04 3496.21,4156.04 3496.21,3386.04 3841.21,3386.04 3841.21,4091.04 3991.21,4241.04 3991.21,4416.04 3991.21,4666.04 3946.21,4711.04 3771.21,4711.04 3726.21,4666.04 3721.21,4666.04 3686.21,4631.04 3686.21,4206.04 3641.21,4161.04 3641.21,4151.04
U2_3 on Bottom Layer "Bottom Layer-U2_3" (solid, pour order 2): 3481.21,3386.04 3481.21,4156.04 2391.21,4156.04 2391.21,3751.04 2396.21,3746.04 3116.21,3746.04 3121.21,3741.04 3121.21,3386.04
Q4_3 on Bottom Layer "Bottom Layer-Q4_3" (solid, pour order 4): 3111.21,3731.04 3111.21,2996.04 3106.21,3001.04 2391.21,3001.04 2391.21,3731.04
Q7_3 on Bottom Layer "Bottom Layer-Q7_3" (solid, pour order 6): 3111.21,2986.04 2391.21,2986.04 2391.21,1911.04 2396.21,1906.04 2736.21,1906.04 2751.21,1921.04 2751.21,2636.04 2766.21,2651.04 3111.21,2651.04
Q10_3 on Bottom Layer "Bottom Layer-Q10_3" (solid, pour order 8): 2766.21,2631.04 2766.21,1911.04 2771.21,1906.04 3836.21,1906.04 3841.21,1911.04 3841.21,2256.04 3116.21,2256.04 3111.21,2261.04 3111.21,2641.04 2776.21,2641.04
U7_2 on Bottom Layer "Bottom Layer-U7_2" (solid, pour order 10): 3836.21,2271.04 3831.21,2276.04 3156.21,2276.04 3126.21,2306.04 3126.21,2341.04 3126.21,2951.04 3161.21,2986.04 3781.21,2986.04 3836.21,2931.04
U4_2 on Bottom Layer "Bottom Layer-U4_2" (solid, pour order 12): 3121.21,3371.04 3121.21,2996.04 4571.21,2996.04 4571.21,3001.04 4571.21,3376.04
U1_2 on Bottom Layer "Bottom Layer-U1_2" (solid, pour order 14): 4571.21,2986.04 3846.21,2986.04 3856.21,2976.04 3856.21,1906.04 4226.21,1906.04 4226.21,2626.04 4231.21,2631.04 4571.21,2631.04
U1_3 on Bottom Layer "Bottom Layer-U1_3" (solid, pour order 16): 4236.21,2616.04 4236.21,1906.04 5311.21,1906.04 5311.21,2271.04 5306.21,2276.04 4601.21,2276.04 4571.21,2306.04 4571.21,2616.04
U6_2 on Bottom Layer "Bottom Layer-U6_2" (solid, pour order 18): 4586.21,2986.04 5311.21,2986.04 5311.21,2286.04 4606.21,2286.04 4586.21,2306.04 4586.21,2316.04
U9_2 on Bottom Layer "Bottom Layer-U9_2" (solid, pour order 20): 5311.21,2996.04 5316.21,3001.04 5316.21,4081.04 5311.21,4086.04 4976.21,4086.04 4961.21,4071.04 4961.21,3381.04 4956.21,3376.04 4591.21,3376.04 4581.21,3366.04 4581.21,3026.04 4581.21,2996.04 4591.21,2996.04
U12_2 on Bottom Layer "Bottom Layer-U12_2" (solid, pour order 22): 4951.21,4086.04 4946.21,4081.04 4946.21,3386.04 4246.21,3386.04 4236.21,3396.04 4236.21,3906.04 4416.21,4086.04 4516.21,4086.04
GND on Bottom Layer "Bottom Layer-GND" (solid, pour order 24): 3851.21,3386.04 4221.21,3386.04 4221.21,3906.04 4416.21,4101.04 4521.21,4101.04 4541.21,4121.04 4541.21,4386.04 4526.21,4401.04 4496.21,4401.04 4486.21,4391.04 4476.21,4391.04 4461.21,4376.04 4461.21,4311.04 4451.21,4301.04 4396.21,4301.04 4361.21,4336.04 4361.21,4551.04 4361.21,4671.04 4321.21,4711.04 4051.21,4711.04 4006.21,4666.04 4006.21,4241.04 3856.21,4091.04 3851.21,4091.04
Q1_4 on Top Layer "Top Layer-Q1_4" (solid, pour order 26): 3451.21,4061.04 3546.21,4156.04 3756.21,4156.04 3836.21,4076.04 3836.21,3366.04 3836.21,3361.04 3686.21,3361.04 3686.21,3386.04 3686.21,3666.04 3731.21,3711.04 3731.21,3756.04 3686.21,3801.04 3486.21,3801.04 3456.21,3831.04 3451.21,3831.04
VCC on Top Layer "Top Layer-VCC" (solid, pour order 28): 3586.21,3796.04 3481.21,3796.04 3461.21,3776.04 3461.21,3551.04 3451.21,3541.04 3276.21,3541.04 3241.21,3506.04 3121.21,3506.04 3121.21,3386.04 3146.21,3361.04 3641.21,3361.04 3681.21,3401.04 3681.21,3671.04 3706.21,3696.04 3706.21,3761.04 3671.21,3796.04 3656.21,3796.04
U2_3 on Top Layer "Top Layer-U2_3" (solid, pour order 30): 2866.21,3921.04 2821.21,3966.04 2726.21,3966.04 2676.21,3916.04 2676.21,3836.04 2676.21,3751.04 2716.21,3711.04 2876.21,3711.04 2926.21,3711.04 2936.21,3701.04 2936.21,3416.04 2961.21,3391.04 3081.21,3391.04 3111.21,3421.04 3111.21,3511.04 3151.21,3551.04 3186.21,3551.04 3201.21,3566.04 3201.21,3606.04 3251.21,3656.04 3376.21,3656.04 3411.21,3691.04 3411.21,3766.04 3346.21,3831.04 3346.21,3911.04 3336.21,3921.04 2961.21,3921.04
Q4_3 on Top Layer "Top Layer-Q4_3" (solid, pour order 32): 2676.21,3136.04 2676.21,3131.04 2676.21,3016.04 2716.21,2976.04 2876.21,2976.04 2936.21,2976.04 2946.21,2966.04 2946.21,2686.04 2981.21,2651.04 3066.21,2651.04 3091.21,2676.04 3091.21,2981.04 3091.21,2996.04 3121.21,3026.04 3121.21,3211.04 3091.21,3241.04 2751.21,3241.04 2676.21,3166.04 2676.21,3161.04
Q4_3 on Top Layer "Top Layer-Q4_3 1" (solid, pour order 34): 2686.21,3656.04 2601.21,3656.04 2501.21,3556.04 2501.21,3466.04 2456.21,3421.04 2456.21,3411.04 2456.21,3386.04 2491.21,3351.04 2911.21,3351.04 2921.21,3361.04 2921.21,3416.04 2891.21,3446.04 2871.21,3446.04 2856.21,3461.04 2856.21,3511.04 2841.21,3526.04 2841.21,3631.04 2816.21,3656.04 2781.21,3656.04
Q7_3 on Top Layer "Top Layer-Q7_3" (solid, pour order 36): 2576.21,2651.04 2576.21,2366.04 2531.21,2321.04 2531.21,2261.04 2531.21,2221.04 2561.21,2191.04 2661.21,2191.04 2761.21,2291.04 2761.21,2441.04 2776.21,2456.04 2796.21,2456.04 3091.21,2456.04 3101.21,2466.04 3101.21,2616.04 3076.21,2641.04 3001.21,2641.04 2961.21,2641.04 2891.21,2711.04 2851.21,2711.04 2826.21,2736.04 2826.21,2891.04 2791.21,2926.04 2641.21,2926.04 2576.21,2861.04 2576.21,2846.04
Q10_3 on Top Layer "Top Layer-Q10_3" (solid, pour order 38): 2836.21,2346.04 2836.21,2086.04 2851.21,2071.04 3276.21,2071.04 3296.21,2051.04 3516.21,2051.04 3561.21,2096.04 3561.21,2246.04 3516.21,2291.04 3341.21,2291.04 3336.21,2296.04 3306.21,2296.04 3296.21,2306.04 3296.21,2321.04 3296.21,2606.04 3261.21,2641.04 3161.21,2641.04 3126.21,2606.04 3126.21,2446.04 3111.21,2431.04 3056.21,2431.04 3041.21,2416.04 3041.21,2376.04 3026.21,2361.04 2851.21,2361.04
U7_2 on Top Layer "Top Layer-U7_2" (solid, pour order 40): 3596.21,2646.04 3336.21,2646.04 3311.21,2621.04 3311.21,2566.04 3321.21,2556.04 3361.21,2556.04 3386.21,2556.04 3401.21,2541.04 3401.21,2426.04 3401.21,2381.04 3426.21,2356.04 3626.21,2356.04 3716.21,2446.04 3716.21,2566.04 3636.21,2646.04
U7_2 on Top Layer "Top Layer-U7_2 1" (solid, pour order 42): 3111.21,2866.04 3111.21,2981.04 3141.21,3011.04 3141.21,3036.04 3141.21,3301.04 3191.21,3351.04 3291.21,3351.04 3291.21,3051.04 3326.21,3016.04 3461.21,3016.04 3551.21,2926.04 3551.21,2806.04 3541.21,2796.04 3186.21,2796.04 3141.21,2796.04 3111.21,2826.04 3111.21,2831.04
U4_2 on Top Layer "Top Layer-U4_2" (solid, pour order 44): 3311.21,3351.04 4026.21,3351.04 4046.21,3326.04 4051.21,3326.04 4061.21,3316.04 4061.21,3286.04 4036.21,3261.04 3686.21,3261.04 3671.21,3246.04 3671.21,3166.04 3601.21,3096.04 3421.21,3096.04 3386.21,3131.04 3386.21,3256.04 3386.21,3271.04 3366.21,3286.04 3311.21,3286.04
U4_2 on Top Layer "Top Layer-U4_2 1" (solid, pour order 46): 4146.21,3151.04 4151.21,3146.04 4151.21,2991.04 4176.21,2966.04 4411.21,2966.04 4416.21,2961.04 4416.21,2666.04 4446.21,2636.04 4556.21,2636.04 4571.21,2651.04 4571.21,2986.04 4591.21,3006.04 4591.21,3206.04 4546.21,3251.04 4236.21,3251.04
GND on Top Layer "Top Layer-GND" (solid, pour order 48): 4006.21,4541.04 4066.21,4601.04 4136.21,4601.04 4311.21,4601.04 4361.21,4551.04 4361.21,4336.04 4301.21,4276.04 4301.21,4176.04 4221.21,4096.04 3976.21,4096.04 3956.21,4076.04 3956.21,3961.04 3971.21,3946.04 4091.21,3946.04 4136.21,3901.04 4136.21,3701.04 4081.21,3646.04 3961.21,3646.04 3921.21,3606.04 3921.21,3556.04 3856.21,3556.04 3851.21,3561.04 3851.21,4086.04 4006.21,4241.04 4006.21,4451.04
U1_2 on Top Layer "Top Layer-U1_2" (solid, pour order 50): 4301.21,2911.04 4101.21,2911.04 3986.21,2796.04 3986.21,2666.04 3986.21,2236.04 4031.21,2191.04 4241.21,2191.04 4266.21,2216.04 4266.21,2451.04 4271.21,2456.04 4556.21,2456.04 4571.21,2471.04 4571.21,2576.04 4531.21,2616.04 4421.21,2616.04 4396.21,2641.04 4396.21,2666.04 4331.21,2731.04 4331.21,2881.04
U1_3 on Top Layer "Top Layer-U1_3" (solid, pour order 52): 4316.21,2361.04 4316.21,2116.04 4416.21,2016.04 4981.21,2016.04 5026.21,2061.04 5026.21,2151.04 5036.21,2161.04 5036.21,2231.04 4986.21,2281.04 4941.21,2281.04 4811.21,2281.04 4791.21,2281.04 4771.21,2301.04 4771.21,2316.04 4771.21,2611.04 4666.21,2611.04 4591.21,2536.04 4591.21,2526.04 4591.21,2436.04 4576.21,2421.04 4526.21,2421.04 4526.21,2411.04 4486.21,2371.04 4476.21,2371.04 4326.21,2371.04
U6_2 on Top Layer "Top Layer-U6_2" (solid, pour order 54): 4791.21,2566.04 4791.21,2596.04 4791.21,2611.04 4801.21,2621.04 4836.21,2621.04 5186.21,2621.04 5216.21,2591.04 5216.21,2461.04 5101.21,2346.04 4906.21,2346.04 4871.21,2381.04 4871.21,2411.04 4871.21,2536.04 4841.21,2566.04 4791.21,2566.04
U6_2 on Top Layer "Top Layer-U6_2 1" (solid, pour order 56): 5031.21,2791.04 4976.21,2736.04 4586.21,2736.04 4586.21,2981.04 4611.21,3006.04 4611.21,3031.04 4611.21,3376.04 4716.21,3376.04 4771.21,3331.04 4771.21,3236.04 4771.21,3096.04 4771.21,3036.04 4806.21,3016.04 4981.21,3016.04 5031.21,2946.04 5031.21,2881.04
U9_2 on Top Layer "Top Layer-U9_2" (solid, pour order 58): 5206.21,3166.04 5131.21,3091.04 4871.21,3091.04 4851.21,3111.04 4851.21,3296.04 4796.21,3296.04 4791.21,3301.04 4791.21,3326.04 4701.21,3416.04 4696.21,3421.04 4621.21,3421.04 4596.21,3446.04 4596.21,3536.04 4606.21,3546.04 4921.21,3546.04 4941.21,3566.04 4941.21,3751.04 5001.21,3811.04 5146.21,3811.04 5206.21,3751.04 5206.21,3231.04
U12_2 on Top Layer "Top Layer-U12_2" (solid, pour order 60): 4801.21,3981.04 4871.21,3911.04 4876.21,3911.04 4876.21,3651.04 4851.21,3626.04 4676.21,3626.04 4661.21,3611.04 4661.21,3581.04 4641.21,3561.04 4636.21,3561.04 4586.21,3611.04 4586.21,3981.04 4586.21,4051.04 4611.21,4076.04 4671.21,4076.04 4696.21,4051.04 4696.21,3996.04 4711.21,3981.04 4721.21,3981.04
U12_2 on Top Layer "Top Layer-U12_2 1" (solid, pour order 62): 4236.21,3806.04 4206.21,3776.04 4206.21,3601.04 4206.21,3566.04 4181.21,3541.04 4166.21,3541.04 3876.21,3541.04 3851.21,3516.04 3851.21,3411.04 3896.21,3366.04 4446.21,3366.04 4476.21,3396.04 4476.21,3731.04 4396.21,3811.04 4386.21,3811.04

## Keep-outs
Keep-Out Layer:
  lines w10: 2287,4666.58 cw(c2385.42,4667.07) 2385.42,4765.5 ; 2287.78,1959.97 ccw(c2395,1959.97) 2395,1852.75 ; 5341.21,1851.04 ccw(c5341.21,1949.46) 5439.58,1946.25 ; 5342.78,4764.46 cw(c5342.78,4666.04) 5441.21,4666.04

## Other copper
Top Layer:
  region net Q4_4: 3191.21,3946.04 3191.21,4121.04 3161.21,4151.04 2446.21,4151.04 2416.21,4121.04 2416.21,3966.04 2481.21,3966.04 2496.21,3946.04 2571.21,3946.04 2586.21,3966.04 2691.21,3966.04 2711.21,3981.04 2836.21,3981.04 2891.21,3931.04 3176.21,3931.04
  region net Q7_4: 2456.21,3231.04 2566.21,3341.04 3106.21,3341.04 3106.21,3251.04 3101.21,3246.04 2741.21,3246.04 2656.21,3161.04 2593.81,3098.64 2536.21,3098.64
  region net Q10_4: 2401.21,2641.04 2401.21,2091.04 2511.21,1981.04 2516.21,1981.04 2586.21,2051.03 2653.61,2051.03 2533.61,2171.04 2526.21,2171.04 2496.21,2201.04 2496.21,2286.04 2496.21,2641.04
  region net Q12_4: 3116.21,1991.04 3141.21,2016.04 3421.21,2016.04 3431.21,2026.04 3531.21,2026.04 3673.61,2168.43 3696.21,2168.43 3681.21,2153.43 3681.21,2036.04 3571.21,1926.04 3401.21,1926.04 3396.21,1921.04 3126.21,1921.04
  region net Q9_4: 3121.21,2726.04 3136.21,2741.04 3511.21,2741.04 3673.61,2903.43 3696.21,2903.43 3696.21,2771.04 3618.26,2693.08 3351.21,2693.08 3181.21,2693.08
  region net Q6_4: 4526.21,3303.99 4493.26,3271.04 4471.21,3271.04 4281.21,3271.04 4236.21,3271.04 4053.81,3088.64 4011.21,3088.64 4061.21,3138.64 4061.21,3221.04 4176.21,3336.04 4241.21,3336.04 4461.21,3336.04
  region net Q3_4: 3876.21,2191.04 3876.21,2331.04 3918.26,2571.04 3951.21,2538.08 3951.21,2466.04 3956.21,2461.04 3956.21,2226.04 4111.21,2071.04 4113.6,2071.04 4128.61,2056.03 4126.21,2056.03 4111.21,2071.04 3996.21,2071.04
  region net Q2_4: 4656.21,1958.08 4689.16,1991.04 4711.21,1991.04 5041.21,1991.04 5166.21,2116.04 5166.21,2163.43 5171.21,2168.43 5171.21,2121.04 5166.21,2116.04 5166.21,2036.04 5056.21,1926.04 4906.21,1926.04 4874.16,1958.08
  region net Q5_4: 4656.21,2688.08 4689.16,2721.04 4736.21,2721.04 4986.21,2721.04 5163.61,2898.43 5171.21,2898.43 5146.21,2873.43 5146.21,2766.04 5041.21,2661.04 4896.21,2661.04 4869.16,2688.08
  region net Q8_4: 5269.16,3431.04 5236.21,3463.99 5236.21,3516.04 5236.21,3746.04 5058.81,3923.43 5058.81,3946.04 5073.82,3931.04 5196.21,3931.04 5306.21,3821.04 5306.21,3661.04 5269.16,3623.99 5269.16,3431.04
  region net Q11_4: 4529.16,3431.04 4491.21,3468.99 4491.21,3546.04 4491.21,3741.04 4318.81,3913.43 4318.81,3946.04 4323.81,3951.04 4461.21,3951.04 4566.21,3846.04 4566.21,3686.04 4529.16,3648.99

## Silkscreen, mask and mechanical layers (free items; w line width, h text height)
Top Overlay:
  text "FULL" at 4938.71,4196.04 h45 r90
  text "<-------" at 4937.39,4168.57 h45 r3
  text "VCC" at 3726.21,4166.67 h78.74
  text "GND" at 4036.21,4166.67 h78.74
Bottom Overlay:
  text "VCC" at 3946.21,4562.04 h78
  text "GND" at 4236.21,4562.04 h78
  text "JLCJLCJLC" at 2298.71,4276.04 h45 r270
Bottom Solder:
  lines w10: 2443.16,4214.72 2445.79,4217.36